# Altium PCB MSXIV_ConnectorTestingBoard.PcbDoc
Units mm, origin at the board's own origin, x right, y up, seen from the top; angles counter-clockwise.
Board outline 100 x 100 mm, 2 copper layers (Top Layer, Bottom Layer); 13 components, 12 nets, 77 pads, 0 vias.
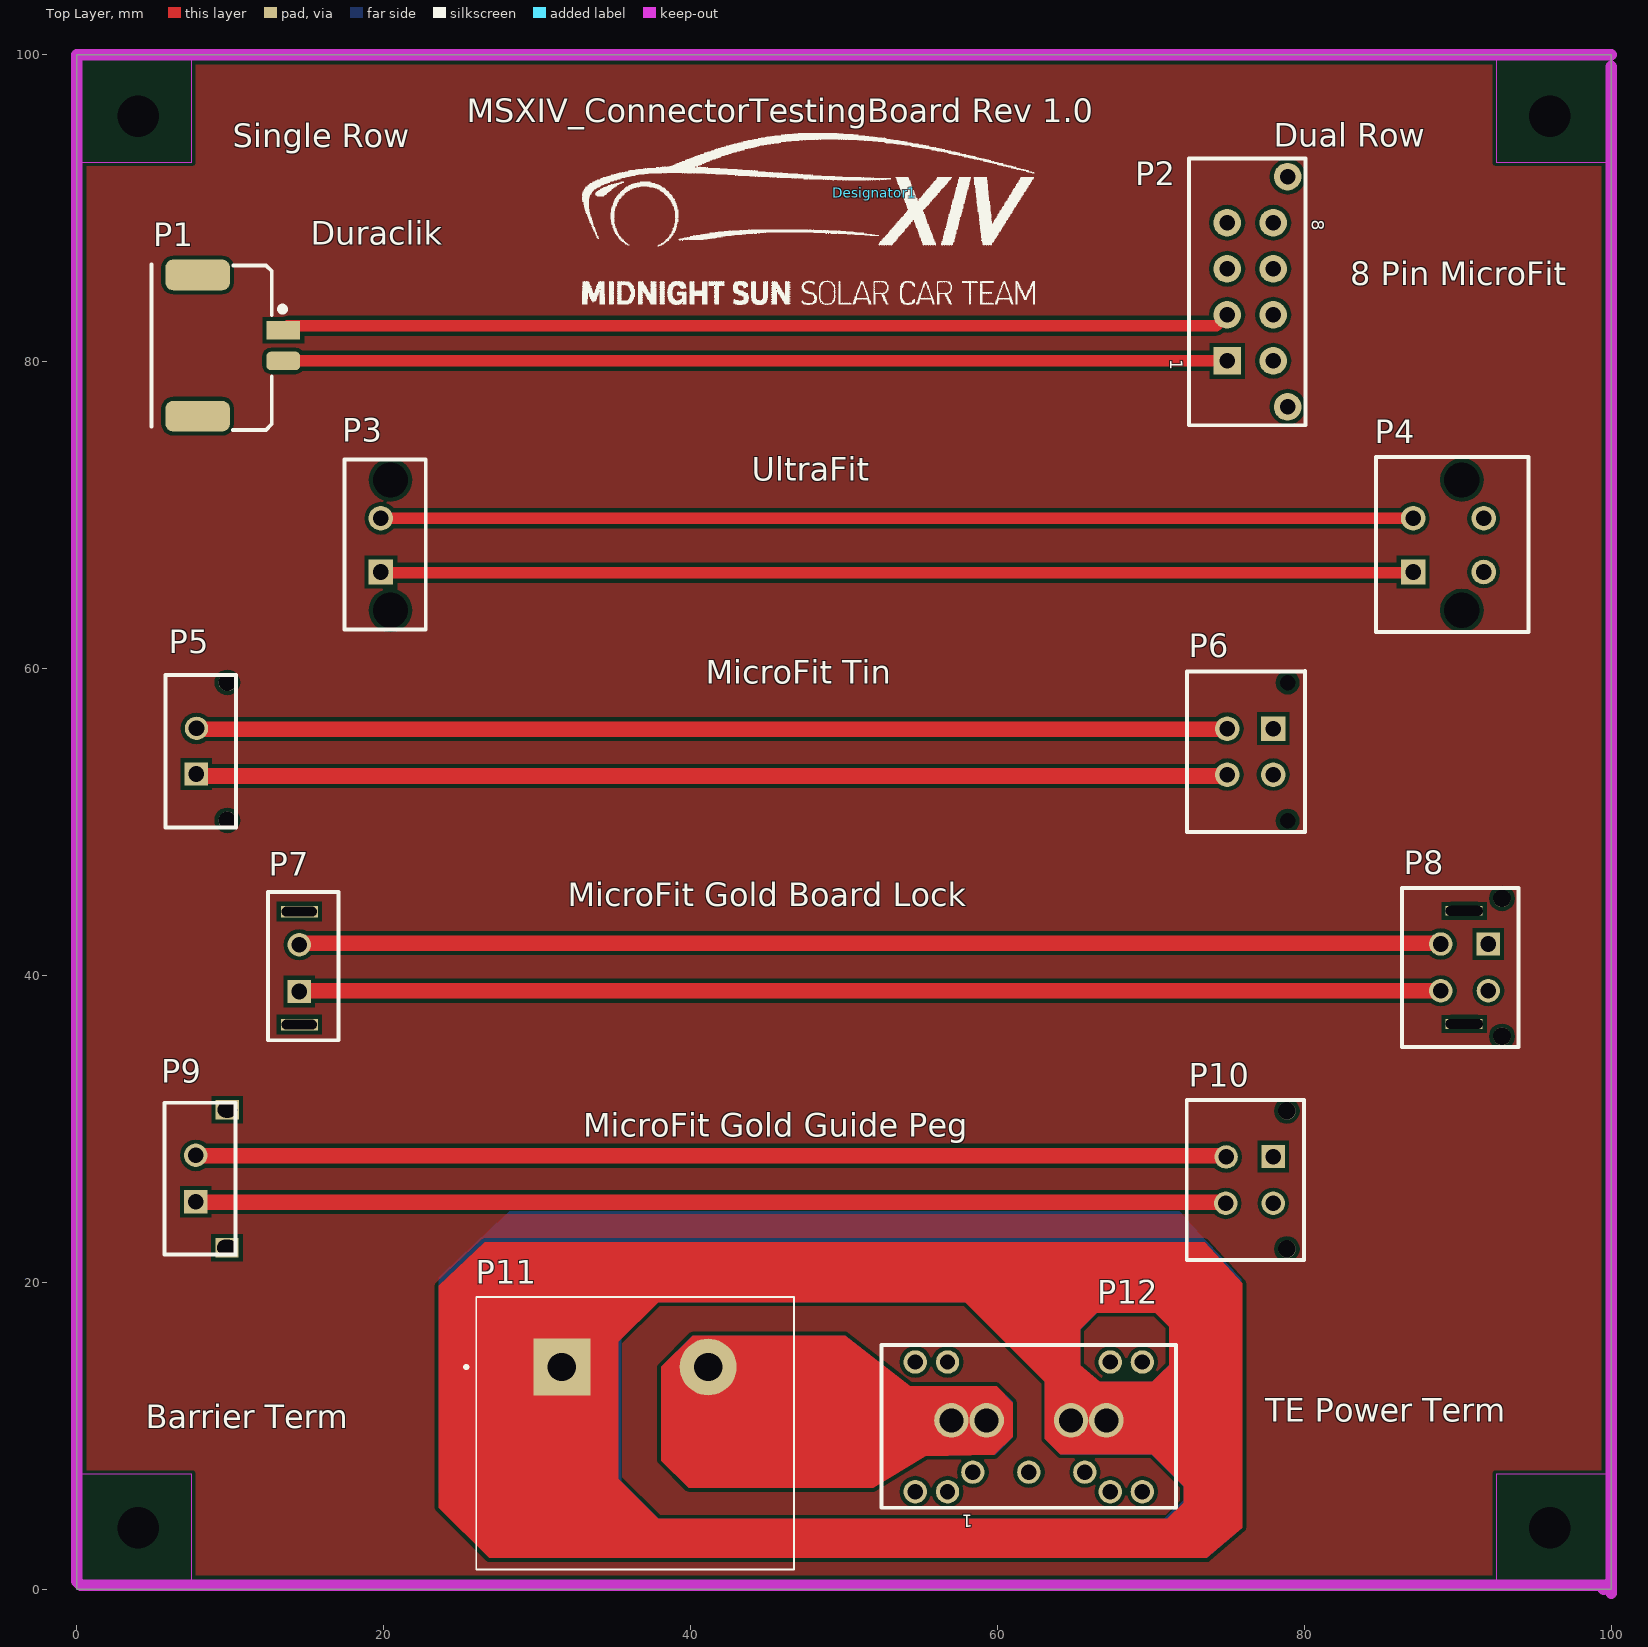
[diagram p0: Top Layer view]
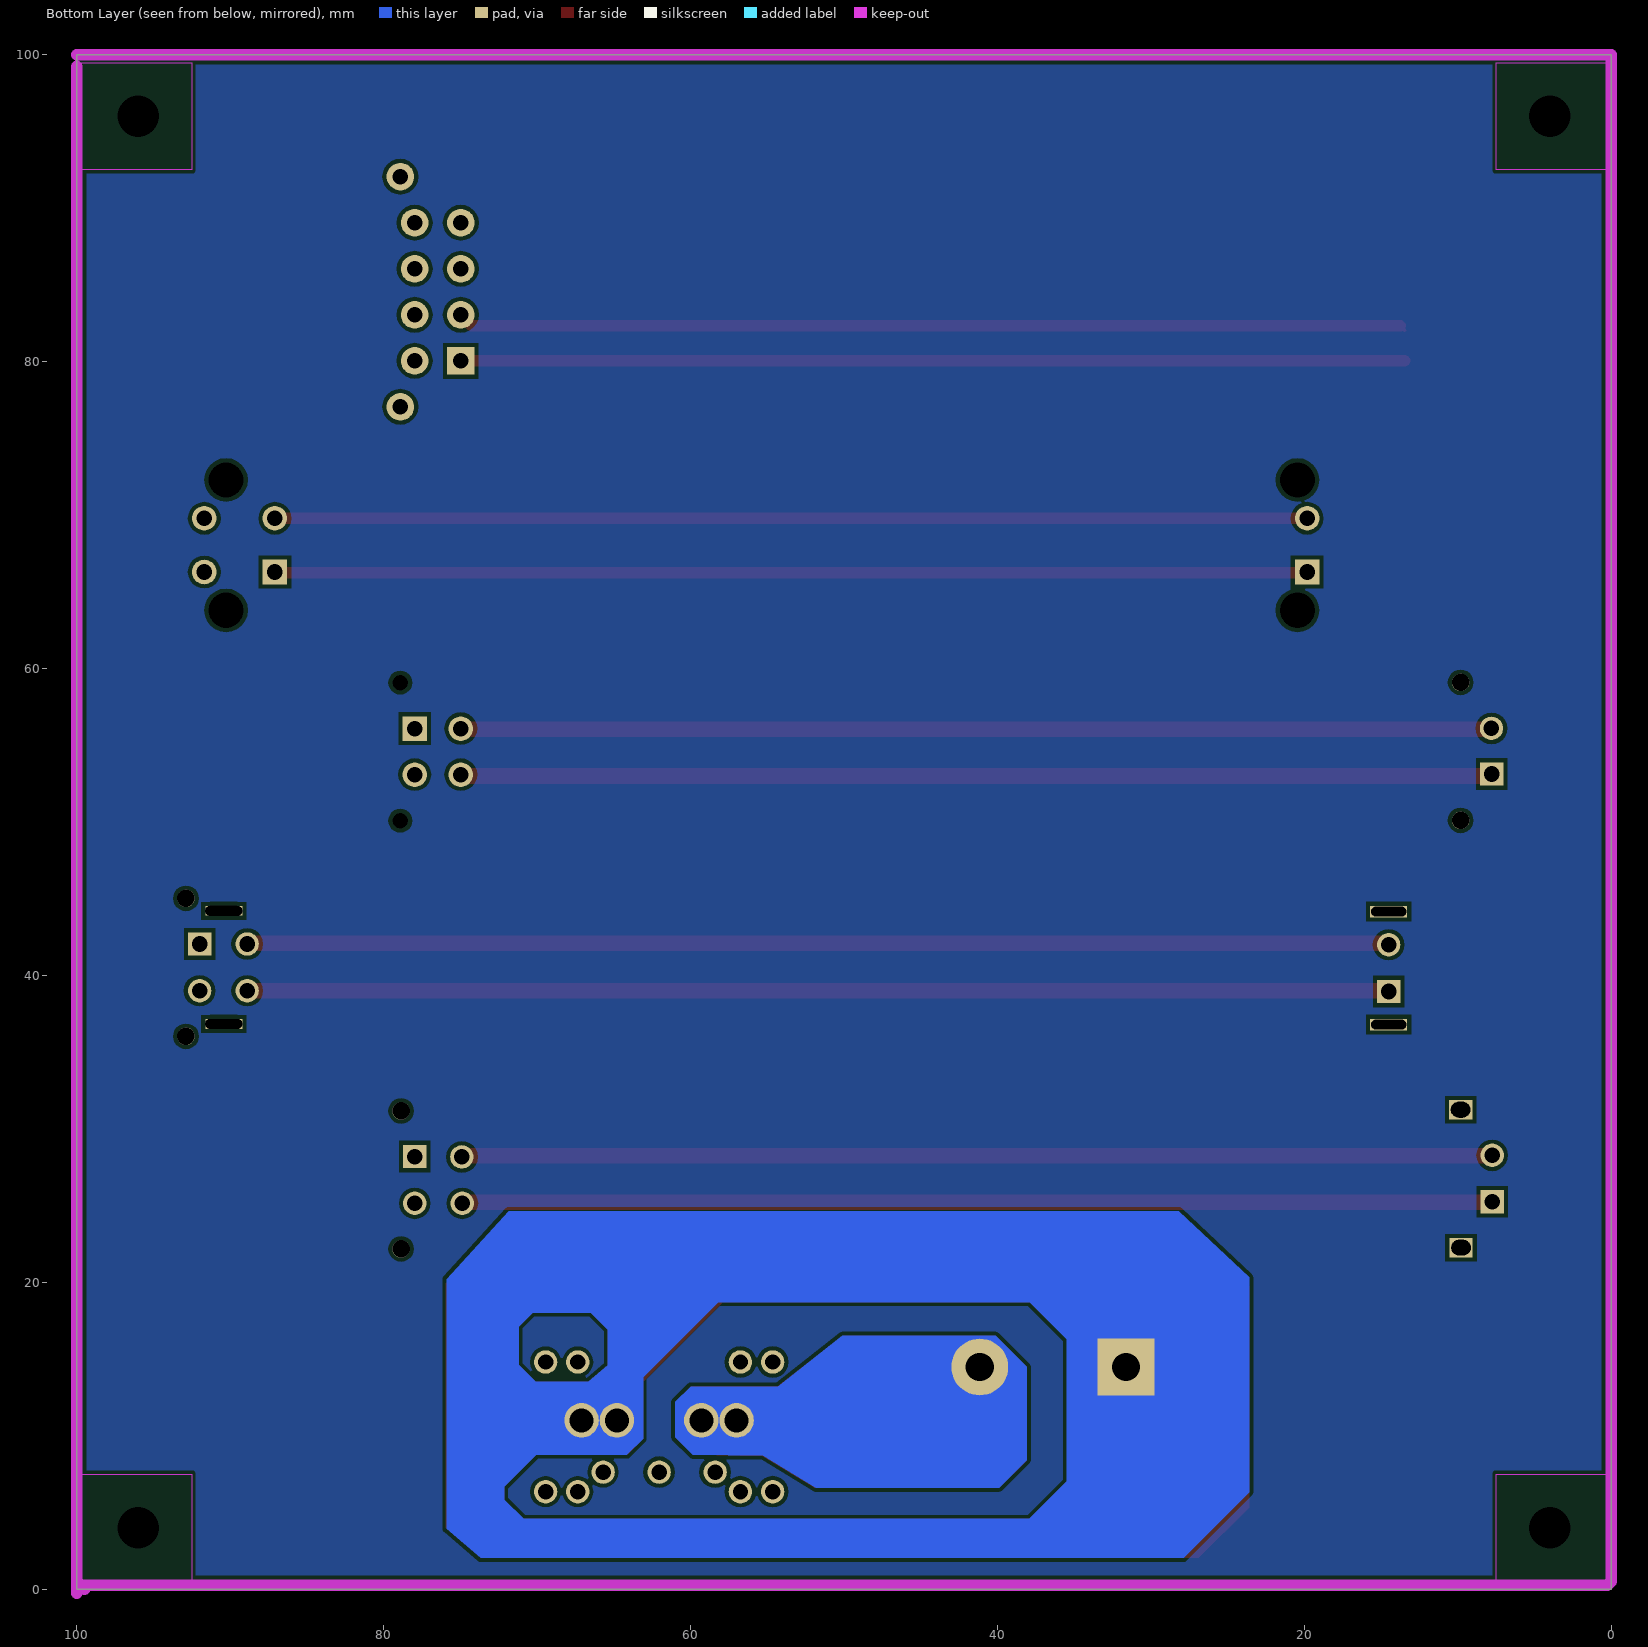
[diagram p1: Bottom Layer view, seen from below]
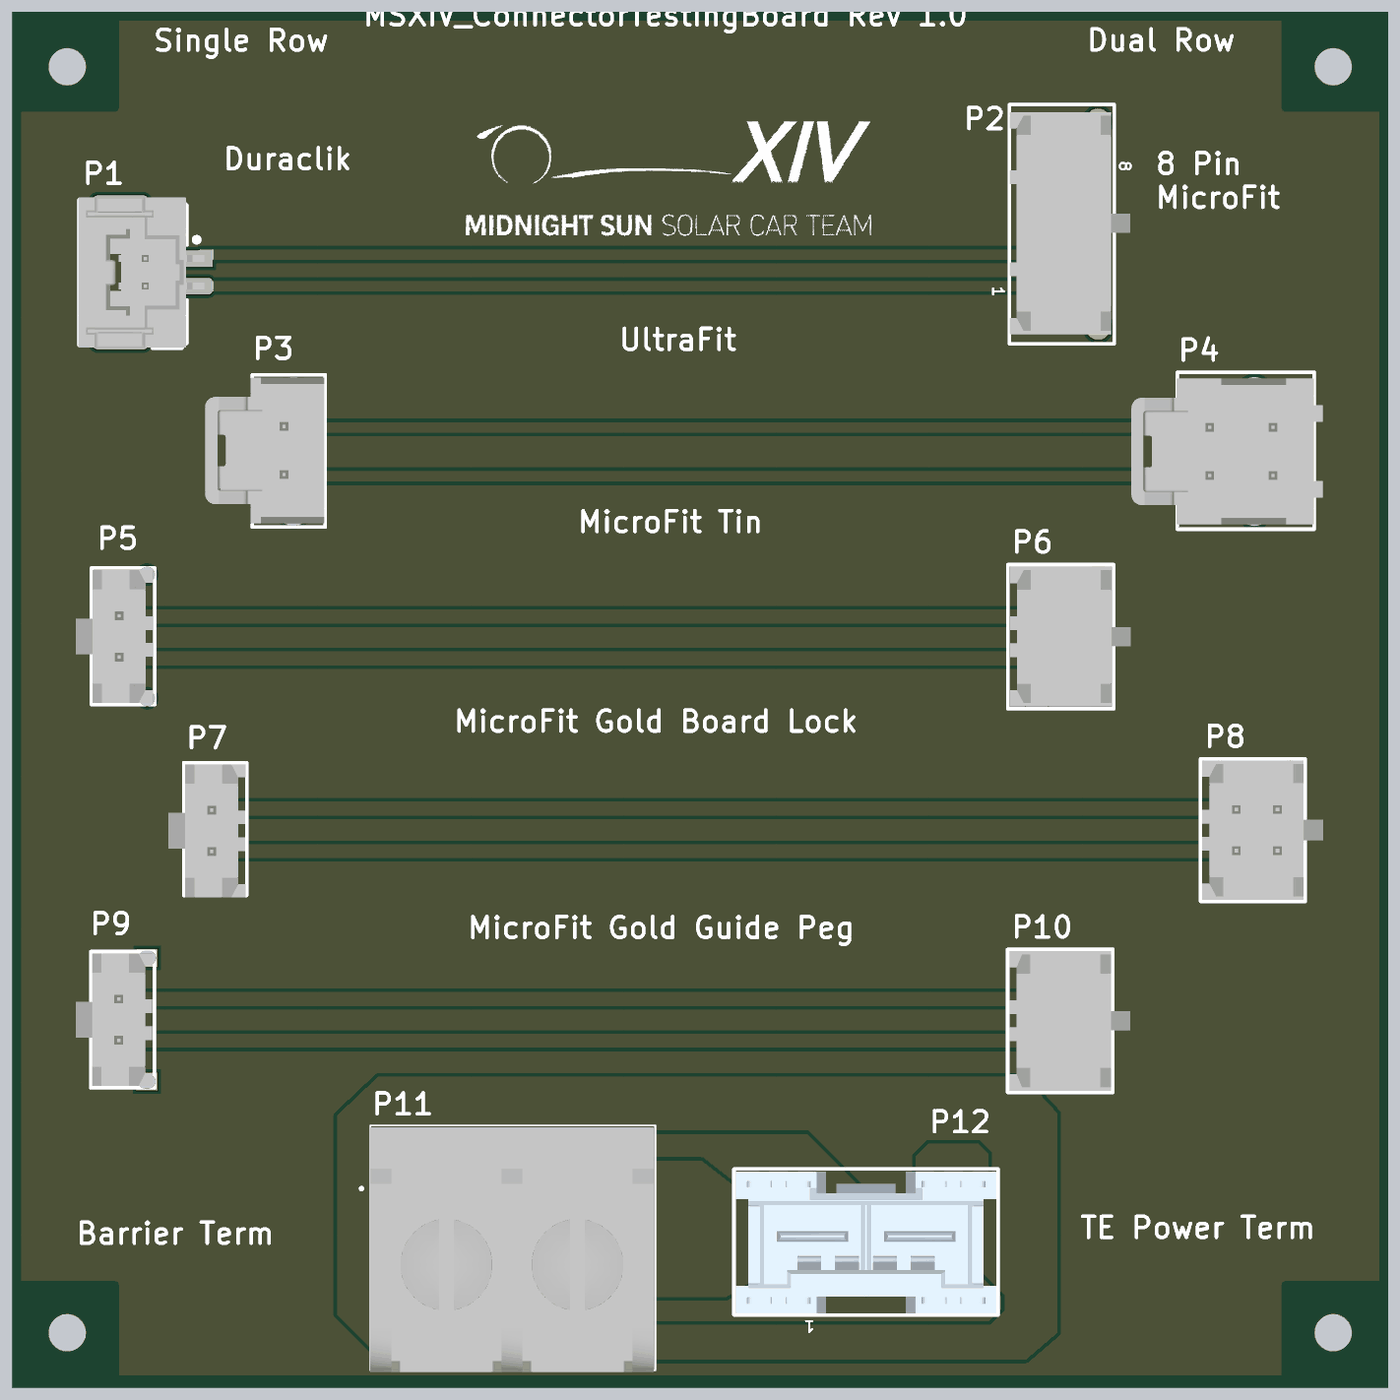
[diagram p2: 3D render of the assembled board from above, using the file's embedded part models]

## Layer stack, top to bottom
Top Solder: solder mask 0.0102, Solder Resist, Dk 3.5
Top Layer: signal copper 0.0356
Dielectric 1: dielectric 0.32, FR-4, Dk 4.8
Bottom Layer: signal copper 0.0356
Bottom Solder: solder mask 0.0102, Solder Resist, Dk 3.5

## Board outline
0,0 100,0 100,100 0,100

## Design rules (kind name [scope] priority, off if disabled: settings)
Clearance [All] p1: gap=0.254 ignorepadtopadclearanceinfootprint=FALSE except(0: Arc-Hole Track-Hole SMDPad-Hole THPad-Hole Via-Hole Fill-Hole Poly-Hole Region-Hole Text-Hole)
PolygonConnect [All] p1: connectstyle=Relief reliefconductorwidth=0.254 reliefentries=4 polygonreliefangle="90 Angle" airgapwidth=0.254
RoutingVias [All] p1: holewidth=0.711 width=1.27 viastyle="Through Hole" minholewidth=0.711 minwidth=1.27 maxholewidth=0.711 maxwidth=1.27
SolderMaskExpansion [All] p1: expansion=0.102
Width [All] p1: maxlimit=0.254 minlimit=0.254 preferedwidth=0.254
30 further rules are at their usual default settings.

## Classes and differential pairs
component class MSXIV_ConnectorTestingBoard: P1 P2 P3 P4 P5 P6 P7 P8 P9 P10 P11 P12

## Components (designator, comment, footprint, x,y, rotation, side; value= is the part's Value field where it differs from the comment)
Designator1 "Comment" "MSXIV LOGO" 52,91 r0 top
P1 "CONN 2POS DURA-CLIK 0.079\" VERT" "CONN, 2POS Dura-Click Vertical" 13.454,82.054 r270 top
P2 "CONN 8POS MICRO-FIT 3mm" "CONN, 8POS MICRO-FIT" 74.978,80.058 r270 top
P3 "CONN 2POS ULTRA-FIT 0.138\"" "CONN, 2POS ULTRA-FIT" 19.812,66.294 r90 top
P4 "CONN 4POS 2 ROW ULTRA-FIT 0.138\"" "CONN, 4POS 2 ROW ULTRA-FIT" 87.094,66.294 r90 top
P5 "CONN 2POS MICRO-FIT 3mm" "CONN 2POS MICRO-FIT 3mm-Footprint-1" 7.775,54.601 r90 top
P6 "CONN 4POS MICRO-FIT 3mm" "CONN 4POS MICROFIT (2x2)" 74.978,53.086 r270 top
P7 "CONN 2POS MICRO-FIT 3MM GOLD BOARD LOCK" "CONN HEADER VERT 2POS 3MM GOLD BOARD LOCK-Footprint-1" 14.5,40.349 r90 top
P8 "CONN 4POS MICRO-FIT 3mm GOLD BOARD LOCK" "CONN 4POS MICRO-FIT 3mm GOLD BOARD LOCK-Footprint-1" 90.425,40.524 r270 top
P9 "CONN 2POS MICRO-FIT 3MM GOLD GUIDE PEGS" "CONN 2POS MICRO-FIT 3MM GOLD GUIDE PEGS-Footprint-1" 7.75,26.75 r90 top
P10 "CONN 4POS MICRO-FIT 3MM GOLD GUIDE PEGS" "CONN 4POS MICRO-FIT 3MM GOLD GUIDE PEGS-Footprint-1" 76.429,26.67 r270 top
P11 "CONN BARRIER STRIP 2CIRC 0.375\"" TE_3-1437652-9 31.618,14.478 r0 top
P12 "CONN HEADER TE  ELCON Mini 2POS PCB" "CONN HEADER TE  ELCON Mini 2POS PCB-Footprint-1" 62.05,11 r270 top

## Footprints (in the part's own frame and the unit in brackets; to place one, negate y for a bottom-side part, rotate by r counter-clockwise, add the part's x,y. Pads: shape width x height; smd on the part's side, far side on the other; paste and mask are expansions set on the pad)
"CONN 2POS MICRO-FIT 3MM GOLD GUIDE PEGS-Footprint-1" [mil]
  rect 50x60 hole 40 slot 50 at 90 deg: 0(-177,-80) 0(177,-81)
  round 60 hole 40: 1(60,0)
  rect 60x60 hole 40: 2(-59,0)
  silkscreen extent -195,-102 195,80, body extent -190,-97 190,123, height 395
"CONN 2POS MICRO-FIT 3mm-Footprint-1" [mil]
  round 45 hole 45: 0(-177,-80) 0(177,-80)
  round 60 hole 40: 1(59,-1)
  rect 60x60 hole 40: 2(-58,0)
  silkscreen extent -195,-102 196,79, body extent -190,-97 190,123, height 395
"CONN 4POS MICRO-FIT 3mm GOLD BOARD LOCK-Footprint-1" [mil]
  round 45 hole 45: 0(-177,97) 0(177,97)
  rect 25x95 hole 25 slot 95 at 90 deg: 0(-145,0) 0(145,0)
  round 60 hole 40: 1(60,-60) 2(-60,-60) 3(60,62)
  rect 60x60 hole 40: 4(-60,62)
  silkscreen extent -204,-160 204,139, body extent -200,-155 200,190, height 395
"CONN 4POS MICRO-FIT 3MM GOLD GUIDE PEGS-Footprint-1" [mil]
  round 45 hole 45: 0(-177,96) 0(177,96)
  round 60 hole 40: 1(60,-61) 2(-59,-60) 3(60,61)
  rect 60x60 hole 40: 4(-60,61)
  silkscreen extent -205,-161 205,140, body extent -200,-155 200,190, height 395
"CONN 4POS MICROFIT (2x2)" [mm]
  round 1.6 hole 1.02: 1(0,0) 2(-3,0) 3(0,3)
  rect 1.6x1.6 hole 1.02: 4(-3,3)
  round 0 hole 1.02: ""(-6,3.94) ""(3,3.94)
  silkscreen extent -6.75,-2.63 3.75,5.06, body extent -6.57,-2.47 3.57,6.29, height 9.91
"CONN HEADER TE  ELCON Mini 2POS PCB-Footprint-1" [mm]
  round 1.524 hole 1: 0(-3.8,7.4) 0(-3.8,5.3) 0(-3.8,-5.3) 0(-3.8,-7.4) 0(3.375,3.65) 0(3.375,0) 0(3.375,-3.65) 0(4.65,7.4) 0(4.65,5.3) 0(4.65,-5.3) 0(4.65,-7.4)
  round 2.25 hole 1.56: 1(0,-2.75) 1(0,-5.05) 2(0,5.05) 2(0,2.75)
  silkscreen extent -4.9,-9.6 5.7,9.6, body extent -4.72,-9.45 5.58,9.45, height 11.05
"CONN HEADER VERT 2POS 3MM GOLD BOARD LOCK-Footprint-1" [mil]
  rect 30x95 hole 25 slot 90 at 90 deg: 0(-140,0) 0(150,0)
  round 60 hole 40: 1(65,0)
  rect 60x60 hole 40: 2(-55,0)
  silkscreen extent -180,-100 200,80, body extent -185,-97 195,123, height 395
"CONN, 2POS Dura-Click Vertical" [mm] "WM7169CT-ND"
  rect 1.2x2.2 smd: 1(0,0)
  rrect50% 1.2x2.2 smd: 2(2,0)
  rrect50% 2x4.2 smd: 3(-3.6,-5.58) 3(5.6,-5.58)
  silkscreen extent -4.28,-8.6 6.5,0.05, body extent -4.45,-8.63 6.45,0.52, height 8
"CONN, 2POS ULTRA-FIT" [mm] "2 Positions Header, Shrouded Connector 0.138\" (3.50mm) Through Hole Gold"
  rect 1.6x1.6 hole 1.02: 1(0,0)
  round 1.6 hole 1.02: 2(3.5,0)
  round 1.6 hole 2.3: ""(-2.5,-0.63) ""(6,-0.63)
  silkscreen extent -3.74,-2.93 7.33,2.37, body extent -3.48,-2.87 7.12,5.79, height 13.85
"CONN, 4POS 2 ROW ULTRA-FIT" [mm]
  rect 1.6x1.6 hole 1.02: 1(0,0)
  round 1.6 hole 1.02: 2(3.5,0) 3(0,-4.6) 4(3.5,-4.6)
  round 0 hole 2.3: ""(-2.5,-3.18) ""(6,-3.18)
  silkscreen extent -3.9,-7.53 7.5,2.42, body extent -3.55,-8.15 7.05,5.76, height 13.9
"CONN, 8POS MICRO-FIT" [mm]
  round 1.8 hole 1.02: 0(-12,3.94) 0(3,3.94) 2(-3,0) 3(-6,0) 4(-9,0) 5(0,3) 6(-3,3) 7(-6,3) 8(-9,3)
  rect 1.8x1.8 hole 1.02: 1(0,0)
  silkscreen extent -13.2,-2.5 4.2,5.1, body extent -12.65,-2.48 3.5,6.29, height 9.95
"MSXIV LOGO" [mm]
  silkscreen extent -19.05,-7.3 10.44,3.89
TE_3-1437652-9 [mil]
  rect 146x146 hole 73: 1(0,0)
  round 146 hole 73: 2(375.2,0)
  silkscreen extent -250,-520 595,180, body extent -220,-525 591,175, height 625

## Part data
P1: library part CMP-007-0025-1, "2 Positions Header, Shrouded Connector 0.079\" (2.00mm) Surface Mount, Vertical Tin", Current Rating=-, Insulation Color=Natural, Manufacturer="Molex, LLC", Manufacturer Part Number=5600200220, Applications="Automotive, Industrial", ComponentLink1Description=http://www.molex.com/pdm_docs/sd/5600200220_sd.pdf, ComponentLink1URL=http://www.molex.com/pdm_docs/sd/5600200220_sd.pdf, Connector Type=Header, Contact Finish - Mating=Tin, Contact Finish - Post=Tin, Contact Finish Thickness - Mating=-, Contact Finish Thickness - Post=-, Contact Length - Mating=-, Contact Length - Post=-, Contact Material="Copper Alloy", Contact Shape=Square, Contact Type="Male Pin", Design Item ID="CONN 2POS DURA-CLIK 0.079\" VERT", Fastening Type="Latch Lock", Features="Solder Retention", Ingress Protection=-, Insulation Height="0.315\" (8.00mm)", Insulation Material="Polyamide (PA), Nylon", Mated Stacking Heights=9.3mm, Material Flammability Rating=-, Mounting Type="Surface Mount", Number of Positions=2, Number of Positions Loaded=All, Number of Rows=1, Operating Temperature=-, Overall Contact Length=-, Packaging="Cut Tape (CT)", Part Status=Active, Pitch - Mating="0.079\" (2.00mm)", Pricing 1="1=1.16, 10=1.012, 25=0.952, 50=0.9122, 100=0.8727, 250=0.79336 (CAD)", RoHS="RoHS Compliant", Row Spacing - Mating=-, Shrouding="Shrouded - 4 Wall", Source="Schematic Diagrams.SchLib", Stock 1=11912, Style="Board to Cable/Wire", Termination=Solder, Voltage Rating=-
P2: library part CMP-007-0004-1, "Connector Header Through Hole 6 position 0.118\" (3.00mm)", Current Rating=-, Insulation Color=Black, Manufacturer="Molex, LLC", Manufacturer Part Number=0430450827, Material Flammability Rating="UL94 V-0", Applications="General Purpose, Medical, Military, Telecommunications", ComponentLink1Description=https://www.molex.com/pdm_docs/sd/430450627_sd.pdf, ComponentLink1URL=https://www.molex.com/pdm_docs/sd/430450627_sd.pdf, ComponentLink2Description=https://www.molex.com/pdm_docs/sd/430450827_sd.pdf, ComponentLink2URL=https://www.molex.com/pdm_docs/sd/430450827_sd.pdf, Connector Type=Header, Contact Finish - Mating=Tin, Contact Finish - Post=Tin, Contact Finish Thickness - Mating="60.0µin (1.52µm)", Contact Finish Thickness - Post=-, Contact Length - Mating=-, Contact Length - Post="0.125\" (3.18mm)", Contact Material=Brass, Contact Shape=Square, Contact Type="Male Pin", Design Item ID="CONN 8POS MICRO-FIT 3mm", Fastening Type="Locking Ramp", Features="Board Guide", Ingress Protection=-, Insulation Height="0.390\" (9.91mm)", Insulation Material="Liquid Crystal Polymer (LCP), Glass Filled", Mated Stacking Heights=-, Mounting Type="Through Hole", Number of Positions=6, Number of Positions Loaded=All, Number of Rows=2, Operating Temperature=-, Overall Contact Length=-, Packaging=Tray, Part Status=Active, Pitch - Mating="0.118\" (3.00mm)", Pricing 1="1=2.69, 10=2.445, 25=2.2964, 50=2.1964, 100=2.0965, 250=1.8968, 500=1.74704, 1440=1.49746, 2880=1.39763 (CAD)", RoHS="RoHS Compliant", Row Spacing - Mating="0.118\" (3.00mm)", Shrouding="Shrouded - 4 Wall", Source="Schematic Diagrams.SchLib", Stock 1=5553, Style="Board to Cable/Wire", Termination=Solder, Voltage Rating=-
P3: library part CMP-007-0011-1, "2 Positions Header, Shrouded Connector 0.138\" (3.50mm) Through Hole Gold", Current Rating=-, Insulation Color=Black, Manufacturer 1="Molex, LLC", Manufacturer Part Number 1=1722861302, Material Flammability Rating="UL94 V-0", Operating Temperature="-40°C ~ 120°C", Voltage=400V, ComponentLink1Description=http://www.molex.com/pdm_docs/sd/1722861302_sd.pdf, ComponentLink1URL=http://www.molex.com/pdm_docs/sd/1722861302_sd.pdf, Connector Type=Header, Contact Finish - Mating=Gold, Contact Finish - Post=Tin, Contact Finish Thickness - Mating="30µin (0.76µm)", Contact Finish Thickness - Post="60µin (1.52µm)", Contact Length - Mating=-, Contact Length - Post="0.126\" (3.20mm)", Contact Material="Copper Alloy", Contact Shape=Square, Contact Type="Male Pin", Design Item ID="CONN 2POS ULTRA-FIT 0.138\"", Fastening Type="Latch Holder", Ingress Protection=-, Insulation Height="0.465\" (11.80mm)", Insulation Material="Liquid Crystal Polymer (LCP)", Mated Stacking Heights=26.99mm, Mounting Type="Through Hole", Number of Positions=2, Number of Positions Loaded=All, Number of Rows=1, Overall Contact Length=-, Packaging=Tray, Part Status=Active, Pitch - Mating="0.138\" (3.50mm)", Row Spacing - Mating=-, Series=UltraFit, Shrouding="Shrouded - 4 Wall", Source="Schematic Diagrams.SchLib", Style="Board to Board or Cable", Termination="Kinked Pin, Solder"
P4: library part CMP-007-0027-2, "Connector Header Through Hole 4 position 0.138\" (3.50mm)", Colour=Black, Manufacturer 1=Molex, Manufacturer Part Number 1=1722991104, ComponentLink1Description=http://www.literature.molex.com/SQLImages/kelmscott/Molex/PDF_Images/987651-1008.pdf, ComponentLink1URL=http://www.literature.molex.com/SQLImages/kelmscott/Molex/PDF_Images/987651-1008.pdf, Connector Type="Male Pin", Contact Plating=Tin, Description 1="ULTRA-FIT HDR VT DUAL F BLK 04CKT TIN", Design Item ID="CONN 4POS 2 ROW ULTRA-FIT 0.138\"", Fastening Type=Latch, Mount="Through Hole", Number of Positions=4, Number of Rows=2, Packaging=Tray, Pitch=0.138inch, Pricing 1="1=0.86, 10=0.753, 100=0.6494, 500=0.53136, 1000=0.47232, 5000=0.41328, 10000=0.39262 (USD)", Row Spacing=0.181inch, Source="Schematic Diagrams.SchLib", Stock 1=958, Termination=Solder
P5: library part CMP-002-00074-8, "Conn Power HDR 2 POS 3mm Solder ST Thru-Hole 2 Terminal 1 Port Tray", Contact Resistance=10mR, Current Rating=5A, Flammability Rating="UL94 V-0", Housing Color=Black, Max Operating Temperature=105°C, Max Voltage Rating (AC)=250V, Max Voltage Rating (DC)=250.25kV, Min Operating Temperature=-40°C, Package Quantity=3264, Voltage Rating=600V, Connector Type="Male Pin", Contact Material=Brass,Tin, Contact Plating=Tin, Depth=4.57mm, Gender=Male, Glow Wire Compliant=Compliant, Halogen Free="Low Halogen", Height=9.9mm, Housing Material=Thermoplastic, Lead Free="Lead Free", Length=9.65mm, Max Current Rating=5A, Mount="Through Hole", Number of Circuits=2, Number of Contacts=2, Number of Positions=2, Number of Rows=1, Orientation=Vertical, Packaging=Tray, Pins=2, Pitch=3mm, Radiation Hardening=No, REACH SVHC=Unknown, Termination=Solder, Voltage Rating (DC)=250V
P6: library part CMP-003-0105-1, "Micro-Fit 3.0 Vertical Header, 3.00mm Pitch, Dual Row, 4 Circuits, with PCB Polarizing Peg, Tin, Glow-Wire Capable, Black", Color=Black, Contact Resistance=10mR, Current Rating=-, Manufacturer="Molex, LLC", Manufacturer Part Number=430450427, Material Flammability Rating="UL94 V-0", Max Operating Temperature=105°C, Min Operating Temperature=-40°C, Package Quantity=2232, Applications="General Purpose, Medical, Military, Telecommunications", ComponentLink1Description=http://www.molex.com/webdocs/datasheets/pdf/en-us/0430450427_PCB_HEADERS.pdf, ComponentLink1URL=http://www.molex.com/webdocs/datasheets/pdf/en-us/0430450427_PCB_HEADERS.pdf, Connector Type=Header, Contact Finish - Mating=Tin, Contact Finish - Post=Tin, Contact Finish Thickness - Mating="60.0µin (1.52µm)", Contact Finish Thickness - Post=-, Contact Length - Mating=-, Contact Length - Post="0.125\" (3.18mm)", Contact Material=Brass, Contact Plating=Tin, Contact Shape=Square, Contact Type="Male Pin", Depth=8.77mm, Design Item ID="CONN 4POS MICRO-FIT 3mm", Fastening Type="Locking Ramp", Features="Board Guide", Housing Color=Black, Housing Material=Polymer, Ingress Protection=-, Insulation Color=Black, Insulation Height="0.390\" (9.91mm)", Insulation Material="Liquid Crystal Polymer (LCP), Glass Filled", Length=10.15mm, Mated Stacking Heights=-, Mount="Through Hole", Mounting Type="Through Hole", Number of Contacts=4, Number of Ports=1, Number of Positions=6, Number of Positions Loaded=All, Number of Rows=2, Number of Terminals=4, Operating Temperature=-, Orientation=Straight, Overall Contact Length=-, Packaging=Tray, Part Status=Active, Pitch=3mm, Pitch - Mating="0.118\" (3.00mm)", RoHS="RoHS Compliant", Row Spacing=0.118inch, Row Spacing - Mating="0.118\" (3.00mm)", Shrouding="Shrouded - 4 Wall", Source="Schematic Diagrams.SchLib", Style="Board to Cable/Wire", Termination=Solder, Voltage Rating=-
P7: library part CMP-002-00072-6, "Conn Power HDR 2 POS 3mm Solder ST Thru-Hole 2 Terminal 1 Port Micro-Fit 3.0™ Tray", Color=Black, Max Operating Temperature=105°C, Min Operating Temperature=-40°C, Package Quantity=3264, Connector Type="Male Pin", Contact Material=Brass, Contact Plating=Gold,GXT, Depth=5.57mm, Fastening Type=Ramp, Housing Material=Thermoplastic, Length=9.65mm, Mount="Through Hole", Number of Contacts=2, Number of Ports=1, Number of Positions=2, Number of Rows=1, Number of Terminals=2, Orientation=Straight, Packaging=Tray, Pitch=3mm, Termination=Solder
P8: library part CMP-002-00073-4, "CONN HEADER VERT 4POS 3MM", Color=Black, Contact Resistance=10mR, Max Operating Temperature=105°C, Min Operating Temperature=-40°C, Connector Type="Male Pin", Contact Material=Brass, Contact Plating=Gold, Depth=8.77mm, Fastening Type=Latch, Housing Color=Black, Housing Material=Polymer, Lead Free="Lead Free", Length=10.15mm, Mount="Through Hole", Number of Contacts=4, Number of Ports=1, Number of Positions=4, Number of Rows=2, Number of Terminals=4, Orientation=Straight, Packaging=Tray, Pitch=3mm, Row Spacing=0.118inch, Termination=Solder
P9: library part CMP-002-00075-6, "Conn; Rect; Header; 2 Cir; PCB; MicroFit 3.0; Vertical; Single; SMT; w/Peg; Gold", Color=Black, Max Operating Temperature=105°C, Max Voltage Rating (AC)=250V, Min Operating Temperature=-40°C, Connector Type="Male Pin", Contact Material=Brass, Contact Plating=Gold, Depth=5.57mm, Fastening Type=Ramp, Housing Material=Polymer, Length=9.65mm, Mount="Through Hole", Number of Contacts=2, Number of Ports=1, Number of Positions=2, Number of Rows=1, Number of Terminals=2, Orientation=Straight, Packaging=Tray, Pitch=3mm, Termination=Solder
P10: library part CMP-002-00076-4, "Conn Power HDR 4 POS 3mm Solder ST Thru-Hole 4 Terminal 1 Port Micro-Fit 3.0™ Tray", Color=Black, Contact Resistance=10mR, Max Operating Temperature=105°C, Max Voltage Rating (AC)=250V, Min Operating Temperature=-40°C, Connector Type="Male Pin", Contact Material=Brass, Contact Plating=Gold, Depth=8.77mm, Fastening Type=Ramp, Housing Color=Black, Housing Material=Polymer, Length=10.15mm, Mount="Through Hole", Number of Contacts=4, Number of Ports=1, Number of Positions=4, Number of Rows=2, Number of Terminals=4, Orientation=Straight, Packaging=Tray, Pitch=3mm, Row Spacing=0.118inch, Termination=Solder
P11: library part CMP-007-0031-3, "Conn Power HDR 5 POS 3mm Solder ST Thru-Hole 5 Terminal 1 Port Micro-Fit 3.0™ Tray", Case/Package=270, Color=Black, Contact Resistance=30mR, Current Rating=5A, Flammability Rating="UL94 V-0", Manufacturer="TE Connectivity", Manufacturer Part Number=6PCV-02-006, Max Current Rating=25A, Max Operating Temperature=105°C, Max Voltage Rating (AC)=250V, Min Operating Temperature=-40°C, Voltage=300V, ComponentLink1Description=https://datasheet.ciiva.com/7978/1650932-7978603.pdf?src-supplier=Element14, ComponentLink1URL=https://datasheet.ciiva.com/7978/1650932-7978603.pdf?src-supplier=Element14, Connector Type="Male Pin", Contact Material="Copper Alloy", Contact Plating=Tin, Depth=5.57mm, Design Item ID="CONN BARRIER STRIP 2CIRC 0.375\"", ELV=Compliant, Fastening Type=Ramp, Height=0.625inch, Housing Color=Black, Housing Material=Thermoplastic, Length=0.811inch, Mount="Through Hole", Mounting Ears="No (Without)", Mounting Insert="No (Without)", Number of Circuits=2, Number of Contacts=2, Number of Levels=1, Number of Ports=1, Number of Positions=2, Number of Rows=1, Number of Terminals=5, Orientation=Straight, Packaging=Bulk, Pitch=9.53mm, Pricing 1="1=1.63000, 10=1.14400, 25=1.06680, 50=0.96820, 100=0.96400, 250=0.81404, 500=0.77122, 1000=0.68552, 5000=0.55699 (USD)", Pricing 2="1=1.14000, 10=0.99900, 100=0.86150, 500=0.70488, 1000=0.62656, 5000=0.54824, 10000=0.52083 (USD)", REACH SVHC=Unknown, RoHS=Yes, Source="Schematic Diagrams.SchLib", Stock 1=8088, Stock 2=6059, Terminal Material="Copper Alloy", Termination=Solder, Voltage Rating=300V, Width=0.7inch, Wire/Cable Gauge=22AWG, Wire Gauge (Max)=12AWG, Wire Gauge (Min)=22AWG
P12: library part CMP-002-00071-4, "CONN HEADER 2POS PCB", Contact Current Rating=40A, Current Rating=45A, Flammability Rating="UL94 V-0", Housing Color=Black, Max Operating Temperature=125°C, Min Operating Temperature=-40°C, Number of Power Positions=2, Package Quantity=150, Circuit Application=Power, Connector System=Wire-to-Board, Connector Type=Pin, Contact Gender=Male, Contact Material="Copper Alloy,Copper", Contact Plating=Silver, Contact Retention="Yes (With)", Depth=10.2mm, Gender=Male, Housing Material=Polymer, Length=18.9mm, Mount="Through Hole", Number of Contacts=2, Number of Ports=1, Number of Positions=2, Number of Rows=1, Number of Terminals=4, Orientation=Straight, Packaging="Tape and Reel", PCB Mounting Orientation=Vertical, Pitch=7.8mm, Radiation Hardening=No, REACH SVHC=Unknown, Row Spacing=7.8mm, Sealable="No (Without)", Termination="Through Hole"

## Free pads (board coordinates)
  round 1.524 hole 2.7: 0(4,4) 0(4,96) 0(96,4) 0(96,96)

## Nets (pads, with @x,y where several pads share a name; then routed paths per layer and width w, separated by ;. In a path a pad name is that pad's centre, name@x,y a point inside that pad or via, vN(x,y) a via of type N, cw(c..) or ccw(c..) an arc to the next point about the centre after c; other vN are vias at no path point)
NetP1_1: P1.1 P2.2 | length 62
  Top Layer w0.254: P1.1 P1.1@13.747,82.347 ; P2.2@74.91,82.415 P2.2@74.978,82.347
  Top Layer w0.762: P1.1@13.747,82.347 74.267,82.347 P2.2
NetP1_2: P1.2 P2.1 | length 61.5
  Top Layer w0.254: P2.1@74.974,80.054 P2.1
  Top Layer w0.762: P1.2 P2.1@74.974,80.054
NetP3_1: P3.1 P4.1 | length 67.6
  Top Layer w0.254: P4.1@86.994,66.194 87.038,66.238 P4.1 P4.1@86.994,66.394
  Top Layer w0.762: P3.1@19.812,66.238 87.038,66.238 P4.1@87.094,66.238
NetP3_2: P3.2 P4.2 | length 67.6
  Top Layer w0.254: P3.2 19.818,69.788 P3.2@19.862,69.744 ; P4.2@86.944,69.744 86.988,69.788 87.044,69.844 P4.2
  Top Layer w0.762: P3.2@19.812,69.788 19.818,69.788 86.988,69.788 P4.2@87.094,69.788
NetP5_1: P5.1 P6.2 | length 67.2
  Top Layer w0.254: P5.1 P5.1@7.85,56.05
  Top Layer w1.016: P5.1@7.85,56.05 P6.2@74.978,56.05
NetP5_2: P5.2 P6.1 | length 67.3
  Top Layer w0.254: P5.2 P5.2@7.903,53
  Top Layer w1.016: P5.2@7.903,53 P6.1@74.978,53
NetP7_1: P7.1 P8.2 | length 74.4
  Top Layer w0.254: P8.2@88.849,42.1 P8.2
  Top Layer w1.016: P7.1@14.5,42.1 P8.2@88.849,42.1
NetP7_2: P7.2 P8.1 | length 74.4
  Top Layer w1.016: P7.2@14.5,39 P8.1
NetP9_1: P9.1 P10.2 | length 67.5
  Top Layer w0.254: P9.1 P9.1@7.775,28.249 ; P10.2@74.679,27.943 P10.2
  Top Layer w1.016: P9.1@7.775,28.249 P10.2@74.905,28.249
NetP9_2: P9.2 P10.1 | length 67.1
  Top Layer w0.254: P9.2 P9.2@7.775,25.226
  Top Layer w1.016: P9.2@7.775,25.226 P10.1@74.879,25.226
NetP11_1: P11.1 P12.2
NetP11_2: P11.2 P12.1
pads on no net: P1.3 P2.0 P2.3 P2.4 P2.5 P2.6 P2.7 P2.8 P3. P4. P4.3 P4.4 P5.0 P6. P6.3 P6.4 P7.0 P8.0 P8.3 P8.4 P9.0 P10.0 P10.3 P10.4 P12.0

## Polygon pours and split planes (outlines as drawn)
no net on Top Layer "Top Layer-No Net" (solid, pour order 4): -2,71
no net on Top Layer "Top Layer-GND" (solid, pour order 2): 0,100 0,0 100,0 100,100
no net on Bottom Layer "Top Layer-GND" (solid, pour order 6): 0.125,100.375 0.125,0.375 100.125,0.375 100.125,100.375

## Keep-outs
Top Layer:
  rectangle: 92.5,0.5 100,7.5
  rectangle: 0,0.5 7.5,7.5
  rectangle: 92.5,93 100,100
  rectangle: 0,93 7.5,100
  region: 0,100
Bottom Layer:
  rectangle: 92.5,0.5 100,7.5
  rectangle: 92.5,92.5 100,99.5
  rectangle: 0,92.5 7.5,99.5
  rectangle: 0,0.5 7.5,7.5
Keep-Out Layer:
  lines w0.762: 100,-0.262 100,99.238 ; 100,0.5 99.5,0 99.75,0.25 0.25,0.25 0,0.5 0,100 100,100

## Other copper
Top Layer:
  region net NetP11_1: 33.933,2.03 73.66,2.034 75.944,3.992 75.944,7.112 75.944,12.155 72.136,8.347 72.136,5.636 71.072,4.572 34.441,4.572 33.86,3.992 33.86,3.81
  region net NetP11_1: 65.278,16.806 66.472,18 70.3,18 71.2,17.1 71.2,10.668 75.946,10.668 75.946,19.951 73.517,22.6 65.278,22.6
  region net NetP11_1: 26.868,2.032 40.468,2.032 35.3,7.2 35.3,16.116 37.884,18.7 57.9,18.7 63.1,13.5 63.1,9.798 64.098,8.8 70.054,8.8 72.254,6.6 75.465,11.42 71.742,15.142 70.1,13.5 66.683,13.5 65.4,14.6 65.4,22.6 26.584,22.6 23.6,19.785 23.6,5.3
  region net NetP11_2: 54.315,13.208 50.09,16.51 40.132,16.51 38.1,14.478 38.1,8.382 39.878,6.604 51.913,6.604 55.307,8.676 59.807,8.753 61,9.946 61,12.152 59.944,13.208
Bottom Layer:
  region net NetP11_2: 54.325,13.2 50.103,16.5 40.1,16.5 38.1,14.5 38.1,8.4 39.896,6.604 51.84,6.604 55.261,8.693 59.872,8.772 61,9.9 61,12.197 59.997,13.2
  region net NetP11_1: 33.427,2.03 73.69,2.035 75.9,3.928 75.9,12.617 72.033,8.75 72.136,8.646 72.136,5.84 70.868,4.572 33.935,4.572 33.354,3.992 33.354,3.81
  region net NetP11_1: 64.77,16.27 66.5,18 70.3,18 71.2,17.1 71.2,11.43 75.9,11.43 75.9,20.209 71.84,24.638 64.77,24.638
  region net NetP11_1: 27.868,2.032 40.468,2.032 35.472,7.028 35.472,16.272 37.9,18.7 58.2,18.7 63.1,13.8 63.1,9.8 64.15,8.75 70.05,8.75 72.141,6.659 75.678,11.969 72.123,15.523 70.1,13.5 66.683,13.5 65.4,14.6 65.4,24.638 28.178,24.638 23.6,20.319 23.6,6.3

## Silkscreen, mask and mechanical layers (free items; w line width, h text height)
Top Overlay:
  text "MSXIV_ConnectorTestingBoard Rev 1.0" at 25.4,95.6 h1.52
  text "Dual Row" at 78,94 h1.52
  text "Single Row" at 10.16,93.98 h1.52
  text "Duraclik" at 15.24,87.63 h1.52
  text "8 Pin MicroFit" at 83,85 h1.52
  text "UltraFit" at 44,72.238 h1.52
  text "MicroFit Tin" at 41,59 h1.52
  text "MicroFit Gold Board Lock" at 32,44.5 h1.52
  text "MicroFit Gold Guide Peg" at 33,29.5 h1.52
  text "TE Power Term" at 77.47,10.922 h1.52
  text "Barrier Term" at 4.5,10.5 h1.52

## Text inside footprints (layer, text, board x,y; h text height)
P2: Top Overlay "1" at 71.278,80.158 h0.8 r270; Top Overlay "8" at 80.478,89.258 h0.8 r270
P12: Top Overlay "1" at 58.4,4.85 h0.8 r180